# Altium PCB FPGA_board.PcbDoc (part 6 of 7)
Units mm, origin at the board's own origin, x right, y up, seen from the top; angles counter-clockwise.
Board outline 120 x 95 mm, 2 copper layers (Top Layer, Bottom Layer); 242 components, 219 nets, 1224 pads, 430 vias.
Unrouted connection lines stored in the file: 9.
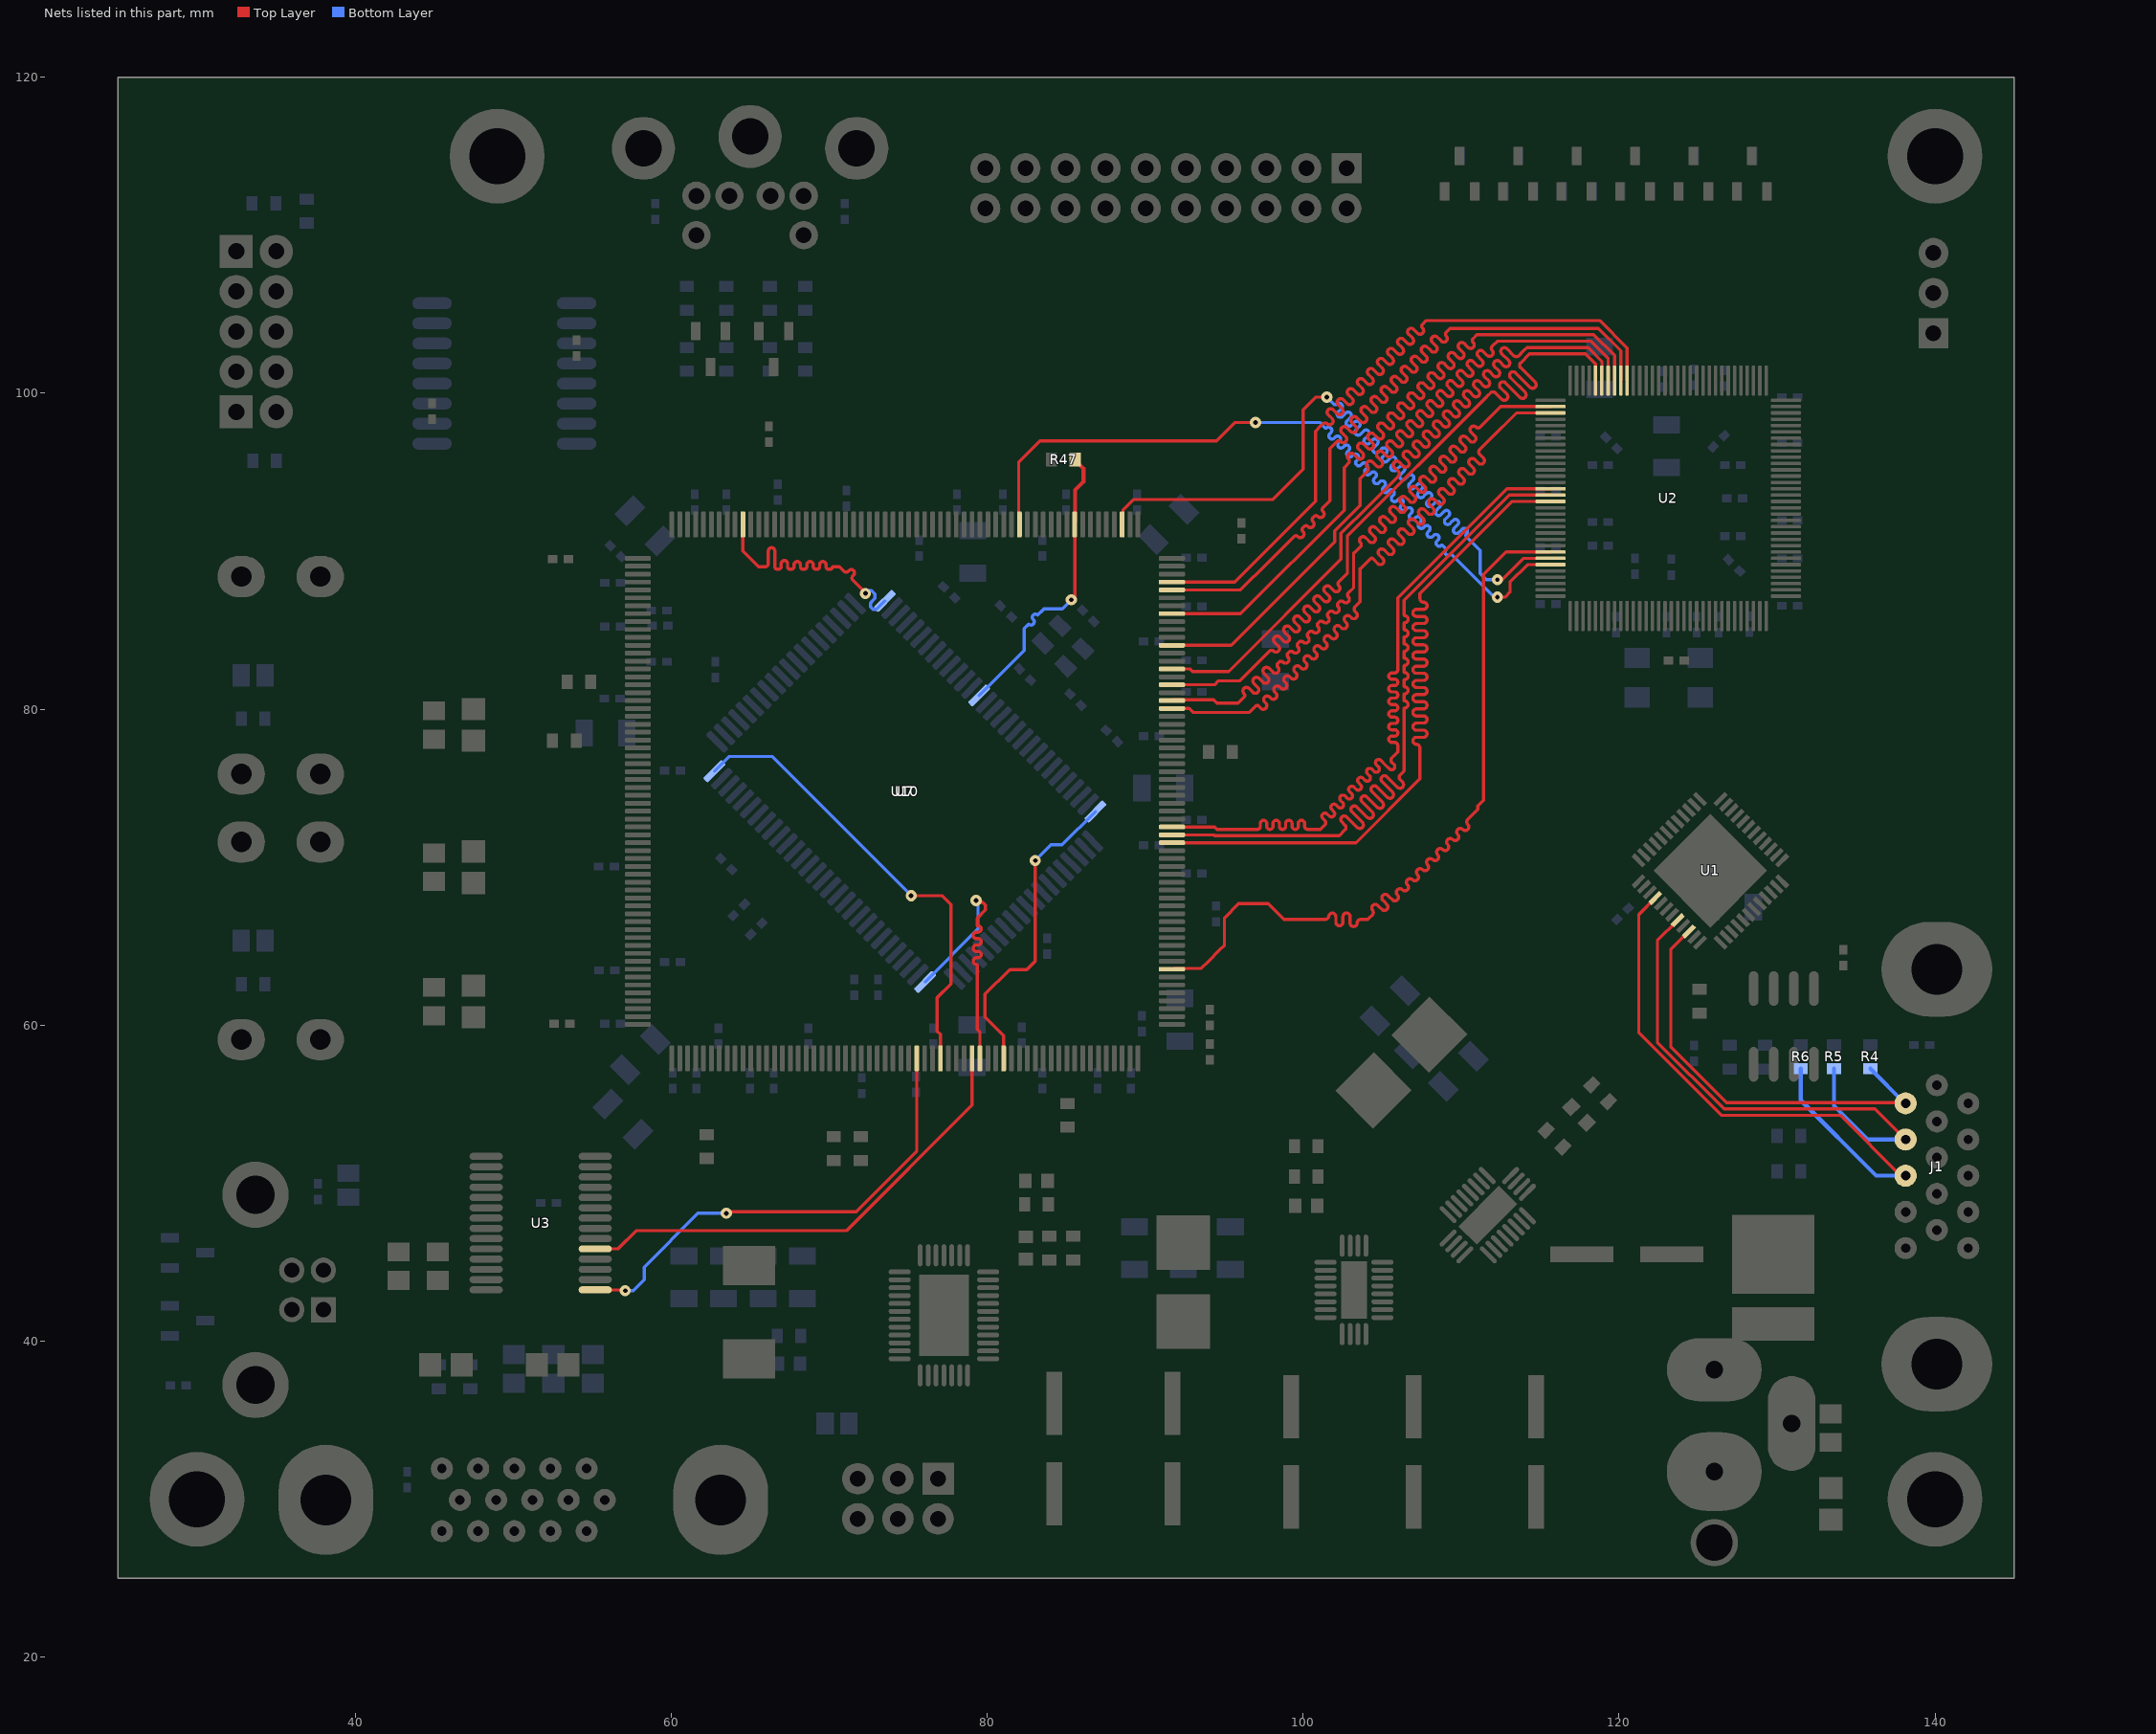
[diagram p6: the nets of this part, all layers, seen from the top]

## Via types
v1: diameter 0.71, hole 0.3, Top Layer to Bottom Layer, 393 vias
v2: diameter 1.4, hole 0.6, Top Layer to Bottom Layer, 32 vias
v3: diameter 2, hole 0.9, Top Layer to Bottom Layer, 4 vias
v4: diameter 1.2, hole 0.5, Top Layer to Bottom Layer, 1 vias

## Nets (pads, with @x,y where several pads share a name; then routed paths per layer and width w, separated by ;. In a path a pad name is that pad's centre, name@x,y a point inside that pad or via, vN(x,y) a via of type N, cw(c..) or ccw(c..) an arc to the next point about the centre after c; other vN are vias at no path point) (continued)
SRAM_PAR0: U7.231 U10.51 | length 19
  Top Layer w0.203: U7.231@64.55,91.7 64.55,90.025 65.55,89.025 65.956,89.025 ccw(c65.956,89.228) 66.159,89.228 66.159,90.022 cw(c66.362,90.022) 66.362,90.225 cw(c66.362,90.022) 66.565,90.022 66.565,89.025 ccw(c66.727,89.025) 66.727,88.863 66.809,88.863 ccw(c66.809,89.025) 66.971,89.025 66.971,89.211 cw(c67.174,89.211) 67.174,89.414 cw(c67.174,89.211) 67.377,89.211 67.377,89.025 ccw(c67.539,89.025) 67.539,88.863 67.621,88.863 ccw(c67.621,89.025) 67.783,89.025 67.783,89.144 cw(c67.986,89.144) 67.986,89.347 cw(c67.986,89.144) 68.189,89.144 68.189,89.025 ccw(c68.351,89.025) 68.351,88.863 68.433,88.863 ccw(c68.433,89.025) 68.595,89.025 68.595,89.144 cw(c68.798,89.144) 68.798,89.347 cw(c68.798,89.144) 69.001,89.144 69.001,89.025 ccw(c69.163,89.025) 69.163,88.863 69.245,88.863 ccw(c69.245,89.025) 69.407,89.025 69.407,89.144 cw(c69.61,89.144) 69.61,89.347 cw(c69.61,89.144) 69.813,89.144 69.813,89.025 ccw(c69.981,89.025) 69.981,88.857 70.051,88.857 ccw(c70.051,89.025) 70.219,89.025 70.65,89.025 70.937,88.738 ccw(c71.081,88.881) 71.224,88.738 71.265,88.778 cw(c71.408,88.635) 71.552,88.778 cw(c71.408,88.635) 71.552,88.491 71.511,88.451 ccw(c71.655,88.307) 71.511,88.164 72.3,87.375 v1(72.3,87.325)
  Bottom Layer w0.203: v1@72.3,87.512 72.688,87.512 72.9,87.3 72.9,87.006 72.625,86.731 72.625,86.475 72.775,86.325 72.996,86.325 U10.51@73.527,86.856
SRAM_PAR1: U7.103 U10.80 | length 20.1
  Top Layer w0.203: U7.103@81.05,57.9 81.05,59.35 79.875,60.525 79.875,61.975 81.4,63.5 81.444,63.5 81.46,63.517 82.516,63.517 83.05,64.05 v1(83.05,70.425)
  Bottom Layer w0.203: v1(83.05,70.425) 84.044,71.419 84.748,71.419 U10.80@86.856,73.527
SRAM_PAR2: U7.100 U10.1 | length 19.3
  Top Layer w0.203: v1(79.3,67.9) 79.352,67.847 79.352,67.802 79.35,67.8 79.7,67.8 79.9,67.6 79.9,67.3 79.375,66.775 79.375,66.5 79.375,66.344 ccw(c79.422,66.344) 79.422,66.297 cw(c79.422,66.094) 79.625,66.094 cw(c79.422,66.094) 79.422,65.891 79.375,65.891 79.328,65.891 ccw(c79.328,65.688) 79.125,65.688 ccw(c79.328,65.688) 79.328,65.485 79.375,65.485 79.422,65.485 cw(c79.422,65.282) 79.625,65.282 cw(c79.422,65.282) 79.422,65.079 79.375,65.079 79.328,65.079 ccw(c79.328,64.876) 79.125,64.876 ccw(c79.328,64.876) 79.328,64.673 79.375,64.673 79.422,64.673 cw(c79.422,64.47) 79.625,64.47 cw(c79.422,64.47) 79.422,64.267 79.375,64.267 79.328,64.267 ccw(c79.328,64.064) 79.125,64.064 ccw(c79.328,64.064) 79.328,63.861 cw(c79.328,63.814) 79.375,63.814 79.375,63.7 79.375,59.725 79.55,59.55 U7.100@79.55,57.9
  Bottom Layer w0.203: U10.1@76.073,62.744 79.425,66.096 79.425,67.725 79.35,67.8 79.352,67.802 79.352,67.847 v1(79.3,67.9)
SRAM_PAR3: U7.95 U10.30 | length 29.7
  Top Layer w0.203: v1@75.369,68.032 v1(75.2,68.2) 77.153,68.2 77.715,67.639 77.715,62.62 76.843,61.749 76.843,59.628 77.05,59.422 U7.95@77.05,57.9
  Bottom Layer w0.203: U10.30@62.744,76.073 63.684,77.013 66.387,77.013 v1(75.2,68.2)
SRAM_ZZ: R47.1 U7.189 U10.64 | length 19.5
  Top Layer w0.203: v1(85.337,86.929) 85.55,87.142 U7.189@85.55,91.7
  Top Layer w0.254: R47.1@85.55,95.8 86.1,95.25 86.1,94.4 85.573,93.873 U7.189@85.573,91.875
  Bottom Layer w0.203: U10.64@79.502,80.881 82.35,83.729 82.35,85.1 82.637,85.387 ccw(c82.781,85.531) 82.924,85.674 cw(c83.068,85.818) 83.211,85.961 ; 83.498,86.248 83.211,85.961 ; v1@85.337,86.712 v1(85.337,86.929) 84.758,86.35 83.6,86.35 83.525,86.275 83.211,85.961
UART_RXD: U3.1 U7.92 | length 30.4
  Top Layer w0.203: U3.1@55.2,43.25 v1@57.1,43.25 ; v1(63.5,48.1) 63.6,48.2 71.73,48.2 75.55,52.02 U7.92@75.55,57.9
  Bottom Layer w0.203: v1(57.1,43.2) 57.6,43.2 58.3,43.9 58.3,44.697 61.703,48.1 v1(63.5,48.1)
UART_TXD: U3.5 U7.99 | length 30.6
  Top Layer w0.203: U3.5@55.2,45.85 56.65,45.85 57.8,47 71.1,47 79.05,54.95 U7.99@79.05,57.9
VGA1_AB: J1.3 R6.1 U1.28 | length 39.9
  Top Layer w0.203: U1.28@122.293,68.06 121.25,67.018 121.25,59.525 126.475,54.3 134,54.3 J1.3@137.822,50.478
  Bottom Layer w0.254: R6.1@131.5,57.25 131.5,55.25 136.272,50.478 J1.3@138.135,50.478
VGA1_AG: J1.2 R5.1 U1.32 | length 34
  Top Layer w0.203: U1.32@123.707,66.646 122.425,65.364 122.425,58.92 126.642,54.703 136.2,54.703 J1.2@138.135,52.767
  Bottom Layer w0.254: R5.1@133.6,57.25 133.6,54.9 135.733,52.767 J1.2@137.809,52.767
VGA1_AR: J1.1 R4.2 U1.34 | length 27.2
  Top Layer w0.203: U1.34@124.414,65.939 123.275,64.8 123.275,58.64 126.809,55.106 J1.1@138.086,55.106
  Bottom Layer w0.254: R4.2@135.9,57.25 138.092,55.057 J1.1@138.135,55.057
VGA1_B0: U2.99 U7.161 | length 53.1
  Top Layer w0.2: U7.161@91.7,80.05 92.784,80.05 93.034,79.8 96.6,79.8 97,80.2 cw(c97.095,80.105) 97.19,80.2 97.325,80.065 ccw(c97.484,80.224) 97.643,80.065 ccw(c97.484,80.224) 97.643,80.384 97.572,80.454 cw(c97.732,80.613) 97.572,80.772 cw(c97.732,80.613) 97.891,80.772 97.961,80.702 ccw(c98.12,80.861) 98.28,80.702 ccw(c98.12,80.861) 98.28,81.02 98.209,81.091 cw(c98.368,81.25) 98.209,81.409 cw(c98.368,81.25) 98.527,81.409 98.598,81.338 ccw(c98.757,81.497) 98.916,81.338 ccw(c98.757,81.497) 98.916,81.656 98.845,81.727 cw(c99.004,81.886) 98.845,82.045 cw(c99.004,81.886) 99.163,82.045 99.234,81.975 ccw(c99.393,82.134) 99.552,81.975 ccw(c99.393,82.134) 99.552,82.293 99.482,82.363 cw(c99.641,82.523) 99.482,82.682 cw(c99.641,82.523) 99.8,82.682 99.871,82.611 ccw(c100.03,82.77) 100.189,82.611 ccw(c100.03,82.77) 100.189,82.929 100.118,83 cw(c100.277,83.159) 100.118,83.318 cw(c100.277,83.159) 100.436,83.318 100.507,83.247 ccw(c100.666,83.406) 100.825,83.247 ccw(c100.666,83.406) 100.825,83.566 100.754,83.636 cw(c100.914,83.795) 100.754,83.954 cw(c100.914,83.795) 101.073,83.954 101.143,83.884 ccw(c101.302,84.043) 101.462,83.884 ccw(c101.302,84.043) 101.462,84.202 101.391,84.273 cw(c101.55,84.432) 101.391,84.591 cw(c101.55,84.432) 101.709,84.591 101.78,84.52 ccw(c101.939,84.679) 102.098,84.52 ccw(c101.939,84.679) 102.098,84.838 102.027,84.909 cw(c102.186,85.068) 102.027,85.227 cw(c102.186,85.068) 102.345,85.227 102.416,85.156 ccw(c102.575,85.316) 102.734,85.156 ccw(c102.575,85.316) 102.734,85.475 102.664,85.545 cw(c102.823,85.705) 102.664,85.864 cw(c102.823,85.705) 102.982,85.864 103.053,85.793 ccw(c103.212,85.952) 103.371,85.793 ccw(c103.212,85.952) 103.371,86.111 103.3,86.182 cw(c103.459,86.341) 103.3,86.5 103.6,86.8 103.6,88.9 103.643,88.9 104.271,89.529 cw(c104.344,89.456) 104.416,89.529 104.73,89.214 ccw(c104.89,89.373) 105.049,89.214 ccw(c104.89,89.373) 105.049,89.532 104.821,89.76 cw(c104.98,89.919) 104.821,90.078 cw(c104.98,89.919) 105.139,90.078 105.367,89.851 ccw(c105.526,90.01) 105.685,89.851 ccw(c105.526,90.01) 105.685,90.169 105.457,90.396 cw(c105.617,90.556) 105.457,90.715 cw(c105.617,90.556) 105.776,90.715 106.003,90.487 ccw(c106.162,90.646) 106.321,90.487 ccw(c106.162,90.646) 106.321,90.805 106.094,91.033 cw(c106.253,91.192) 106.094,91.351 cw(c106.253,91.192) 106.412,91.351 106.64,91.123 ccw(c106.799,91.283) 106.958,91.123 ccw(c106.799,91.283) 106.958,91.442 106.73,91.669 cw(c106.889,91.828) 106.73,91.987 cw(c106.889,91.828) 107.048,91.987 107.276,91.76 ccw(c107.435,91.919) 107.594,91.76 ccw(c107.435,91.919) 107.594,92.078 107.367,92.306 cw(c107.526,92.465) 107.367,92.624 cw(c107.526,92.465) 107.685,92.624 107.912,92.396 ccw(c108.072,92.555) 108.231,92.396 ccw(c108.072,92.555) 108.231,92.714 108.003,92.942 cw(c108.162,93.101) 108.003,93.26 cw(c108.162,93.101) 108.321,93.26 108.549,93.033 ccw(c108.708,93.192) 108.867,93.033 ccw(c108.708,93.192) 108.867,93.351 108.639,93.578 cw(c108.798,93.738) 108.639,93.897 cw(c108.798,93.738) 108.958,93.897 109.185,93.669 ccw(c109.344,93.828) 109.503,93.669 ccw(c109.344,93.828) 109.503,93.987 109.276,94.215 cw(c109.435,94.374) 109.276,94.533 cw(c109.435,94.374) 109.594,94.533 109.822,94.305 ccw(c109.981,94.465) 110.14,94.305 ccw(c109.981,94.465) 110.14,94.624 109.912,94.851 cw(c110.071,95.01) 109.912,95.169 cw(c110.071,95.01) 110.23,95.169 110.458,94.942 ccw(c110.617,95.101) 110.776,94.942 ccw(c110.617,95.101) 110.776,95.26 110.549,95.488 cw(c110.708,95.647) 110.549,95.806 cw(c110.708,95.647) 110.867,95.806 111.094,95.578 ccw(c111.253,95.737) 111.413,95.578 ccw(c111.254,95.737) 111.413,95.896 111.185,96.124 cw(c111.344,96.283) 111.185,96.442 111.344,96.601 111.662,96.92 111.821,97.079 113.496,98.753 U2.99@115.66,98.753
VGA1_B1: U2.98 U7.162 | length 53.5
  Top Layer w0.2: U7.162@91.75,80.6 94.349,80.6 94.554,80.395 95.895,80.395 96.253,80.753 ccw(c96.129,80.877) 96.253,81.001 cw(c96.412,81.16) 96.253,81.319 cw(c96.412,81.16) 96.571,81.319 96.819,81.071 ccw(c96.978,81.231) 97.137,81.071 ccw(c96.978,81.231) 97.137,81.39 96.89,81.637 cw(c97.049,81.796) 96.89,81.955 cw(c97.049,81.796) 97.208,81.955 97.332,81.832 97.455,81.708 ccw(c97.614,81.867) 97.773,81.708 ccw(c97.614,81.867) 97.773,82.026 97.526,82.273 cw(c97.685,82.433) 97.526,82.592 cw(c97.685,82.433) 97.844,82.592 97.968,82.468 98.092,82.344 ccw(c98.251,82.503) 98.41,82.344 ccw(c98.251,82.503) 98.41,82.662 cw(c98.534,82.786) 98.41,82.91 98.481,82.981 cw(c98.604,82.857) 98.728,82.981 ccw(c98.887,83.14) 99.046,82.981 ccw(c98.887,83.14) 99.046,83.299 cw(c99.17,83.423) 99.046,83.546 99.117,83.617 cw(c99.241,83.493) 99.364,83.617 ccw(c99.524,83.776) 99.683,83.617 ccw(c99.524,83.776) 99.683,83.935 cw(c99.806,84.059) 99.683,84.183 99.753,84.253 cw(c99.877,84.13) 100.001,84.253 ccw(c100.16,84.412) 100.319,84.253 ccw(c100.16,84.412) 100.319,84.572 cw(c100.443,84.695) 100.319,84.819 100.39,84.89 cw(c100.514,84.766) 100.637,84.89 ccw(c100.796,85.049) 100.955,84.89 ccw(c100.796,85.049) 100.955,85.208 cw(c101.079,85.332) 100.955,85.455 101.026,85.526 cw(c101.15,85.402) 101.274,85.526 ccw(c101.433,85.685) 101.592,85.526 ccw(c101.433,85.685) 101.592,85.844 cw(c101.716,85.968) 101.592,86.092 101.663,86.163 cw(c101.786,86.039) 101.91,86.163 ccw(c102.069,86.322) 102.228,86.163 ccw(c102.069,86.322) 102.228,86.481 cw(c102.352,86.605) 102.228,86.728 102.299,86.799 cw(c102.423,86.675) 102.546,86.799 ccw(c102.706,86.958) 102.865,86.799 ccw(c102.706,86.958) 102.865,87.117 cw(c102.988,87.241) 102.865,87.365 103.2,87.7 103.2,89.9 103.247,89.9 103.6,90.253 103.635,90.289 ccw(c103.512,90.412) 103.635,90.536 cw(c103.794,90.695) 103.635,90.854 cw(c103.794,90.695) 103.954,90.854 104.077,90.731 104.201,90.607 ccw(c104.36,90.766) 104.519,90.607 ccw(c104.36,90.766) 104.519,90.925 104.395,91.049 104.272,91.173 cw(c104.431,91.332) 104.272,91.491 cw(c104.431,91.332) 104.59,91.491 104.714,91.367 104.837,91.243 ccw(c104.997,91.402) 105.156,91.243 ccw(c104.997,91.402) 105.156,91.562 105.032,91.685 104.908,91.809 cw(c105.067,91.968) 104.908,92.127 cw(c105.067,91.968) 105.226,92.127 105.35,92.003 105.474,91.88 ccw(c105.633,92.039) 105.792,91.88 ccw(c105.633,92.039) 105.792,92.198 105.668,92.322 105.545,92.445 cw(c105.704,92.605) 105.545,92.764 cw(c105.704,92.605) 105.863,92.764 105.986,92.64 106.11,92.516 ccw(c106.269,92.675) 106.428,92.516 ccw(c106.269,92.675) 106.428,92.834 106.305,92.958 106.181,93.082 cw(c106.34,93.241) 106.181,93.4 cw(c106.34,93.241) 106.499,93.4 106.623,93.276 106.747,93.153 ccw(c106.906,93.312) 107.065,93.153 ccw(c106.906,93.312) 107.065,93.471 106.941,93.594 106.817,93.718 cw(c106.976,93.877) 106.817,94.036 cw(c106.976,93.877) 107.136,94.036 107.259,93.913 107.383,93.789 ccw(c107.542,93.948) 107.701,93.789 ccw(c107.542,93.948) 107.701,94.107 107.577,94.231 107.454,94.355 cw(c107.613,94.514) 107.454,94.673 cw(c107.613,94.514) 107.772,94.673 107.896,94.549 108.019,94.425 ccw(c108.179,94.584) 108.338,94.425 ccw(c108.179,94.584) 108.338,94.744 108.214,94.867 108.09,94.991 cw(c108.249,95.15) 108.09,95.309 cw(c108.249,95.15) 108.408,95.309 108.532,95.185 108.656,95.062 ccw(c108.815,95.221) 108.974,95.062 ccw(c108.815,95.221) 108.974,95.38 108.85,95.504 108.727,95.627 cw(c108.886,95.786) 108.727,95.946 cw(c108.886,95.786) 109.045,95.946 109.168,95.822 109.292,95.698 ccw(c109.451,95.857) 109.61,95.698 ccw(c109.451,95.857) 109.61,96.016 109.487,96.14 109.363,96.264 cw(c109.522,96.423) 109.363,96.582 cw(c109.522,96.423) 109.681,96.582 109.805,96.458 109.929,96.334 ccw(c110.088,96.494) 110.247,96.335 ccw(c110.088,96.494) 110.247,96.653 110.123,96.776 109.999,96.9 cw(c110.158,97.059) 109.999,97.218 cw(c110.158,97.059) 110.318,97.218 110.441,97.095 110.565,96.971 ccw(c110.724,97.13) 110.883,96.971 ccw(c110.724,97.13) 110.883,97.289 110.759,97.413 110.636,97.537 cw(c110.795,97.696) 110.636,97.855 cw(c110.795,97.696) 110.954,97.855 ccw(c111.078,97.979) 111.201,97.855 112.173,98.827 112.5,99.153 U2.98@115.66,99.153
VGA1_B2: U2.88 U7.176 | length 53.6
  Top Layer w0.2: U7.176@91.7,87.55 96.05,87.55 97.8,89.3 99.426,90.926 cw(c99.55,90.802) 99.674,90.926 ccw(c99.833,91.085) 99.992,90.926 ccw(c99.833,91.085) 99.992,91.244 cw(c100.116,91.368) 99.992,91.492 100.063,91.563 cw(c100.186,91.439) 100.31,91.563 ccw(c100.469,91.722) 100.628,91.563 ccw(c100.469,91.722) 100.628,91.881 cw(c100.752,92.005) 100.628,92.128 100.699,92.199 cw(c100.823,92.075) 100.946,92.199 ccw(c101.106,92.358) 101.265,92.199 ccw(c101.106,92.358) 101.265,92.517 cw(c101.388,92.641) 101.265,92.765 101.3,92.8 101.7,93.2 101.7,96.5 102.15,96.95 cw(c102.259,96.841) 102.368,96.95 102.383,96.935 ccw(c102.542,97.094) 102.701,96.935 ccw(c102.542,97.094) 102.701,97.253 102.577,97.377 102.453,97.501 cw(c102.612,97.66) 102.453,97.819 cw(c102.612,97.66) 102.771,97.819 102.895,97.695 103.019,97.571 ccw(c103.178,97.731) 103.337,97.571 ccw(c103.178,97.731) 103.337,97.89 103.213,98.013 103.09,98.137 cw(c103.249,98.296) 103.09,98.455 cw(c103.249,98.296) 103.408,98.455 103.532,98.332 103.655,98.208 ccw(c103.814,98.367) 103.973,98.208 ccw(c103.814,98.367) 103.973,98.526 103.85,98.65 103.726,98.773 cw(c103.885,98.933) 103.726,99.092 cw(c103.885,98.933) 104.044,99.092 104.168,98.968 104.292,98.844 ccw(c104.451,99.003) 104.61,98.844 ccw(c104.451,99.003) 104.61,99.162 104.486,99.286 104.362,99.41 cw(c104.521,99.569) 104.362,99.728 cw(c104.521,99.569) 104.681,99.728 104.804,99.604 104.928,99.481 ccw(c105.087,99.64) 105.246,99.481 ccw(c105.087,99.64) 105.246,99.799 105.123,99.923 104.999,100.046 cw(c105.158,100.205) 104.999,100.364 cw(c105.158,100.205) 105.317,100.364 105.441,100.241 105.564,100.117 ccw(c105.724,100.276) 105.883,100.117 ccw(c105.724,100.276) 105.883,100.435 105.759,100.559 105.635,100.683 cw(c105.794,100.842) 105.635,101.001 cw(c105.794,100.842) 105.953,101.001 106.077,100.877 106.201,100.753 ccw(c106.36,100.912) 106.519,100.753 ccw(c106.36,100.912) 106.519,101.072 106.395,101.195 106.272,101.319 cw(c106.431,101.478) 106.272,101.637 cw(c106.431,101.478) 106.59,101.637 106.714,101.514 106.837,101.39 ccw(c106.996,101.549) 107.155,101.39 ccw(c106.996,101.549) 107.155,101.708 107.032,101.832 106.908,101.955 cw(c107.067,102.115) 106.908,102.274 cw(c107.067,102.115) 107.226,102.274 107.35,102.15 107.474,102.026 ccw(c107.633,102.185) 107.792,102.026 ccw(c107.633,102.185) 107.792,102.344 107.668,102.468 107.544,102.592 cw(c107.703,102.751) 107.544,102.91 cw(c107.703,102.751) 107.863,102.91 107.986,102.786 108.11,102.663 ccw(c108.269,102.822) 108.428,102.663 ccw(c108.269,102.822) 108.428,102.981 108.305,103.104 108.181,103.228 cw(c108.34,103.387) 108.181,103.546 cw(c108.34,103.387) 108.499,103.546 108.623,103.423 108.746,103.299 ccw(c108.906,103.458) 109.065,103.299 ccw(c108.906,103.458) 109.065,103.617 cw(c109.188,103.741) 109.065,103.865 109.1,103.9 109.3,104.1 118.7,104.1 120.11,102.69 U2.88@120.11,100.803
VGA1_B3: U2.87 U7.177 | length 52.6
  Top Layer w0.2: U7.177@91.7,88.05 95.684,88.05 100.8,93.166 100.8,97.6 ; 100.95,97.75 100.8,97.6 ; U2.87@120.51,100.803 120.51,102.524 120.51,102.856 118.766,104.6 107.8,104.6 107.6,104.4 107.565,104.365 ccw(c107.688,104.241) 107.565,104.117 cw(c107.406,103.958) 107.565,103.799 cw(c107.406,103.958) 107.246,103.799 107.123,103.923 106.999,104.046 ccw(c106.84,103.887) 106.681,104.046 ccw(c106.84,103.887) 106.681,103.728 106.805,103.605 106.928,103.481 cw(c106.769,103.322) 106.928,103.163 cw(c106.769,103.322) 106.61,103.163 106.486,103.286 106.363,103.41 ccw(c106.203,103.251) 106.044,103.41 ccw(c106.203,103.251) 106.044,103.092 106.168,102.968 106.292,102.844 cw(c106.133,102.685) 106.292,102.526 cw(c106.133,102.685) 105.974,102.526 105.85,102.65 105.726,102.774 ccw(c105.567,102.615) 105.408,102.774 ccw(c105.567,102.615) 105.408,102.455 105.532,102.332 105.655,102.208 cw(c105.496,102.049) 105.655,101.89 cw(c105.496,102.049) 105.337,101.89 105.214,102.014 105.09,102.137 ccw(c104.931,101.978) 104.772,102.137 ccw(c104.931,101.978) 104.772,101.819 104.895,101.695 105.019,101.572 cw(c104.86,101.412) 105.019,101.253 cw(c104.86,101.412) 104.701,101.253 104.577,101.377 104.453,101.501 ccw(c104.294,101.342) 104.135,101.501 ccw(c104.294,101.342) 104.135,101.183 104.259,101.059 104.383,100.935 cw(c104.224,100.776) 104.383,100.617 cw(c104.224,100.776) 104.064,100.617 103.941,100.741 103.817,100.864 ccw(c103.658,100.705) 103.499,100.864 ccw(c103.658,100.705) 103.499,100.546 103.623,100.423 103.746,100.299 cw(c103.587,100.14) 103.746,99.981 cw(c103.587,100.14) 103.428,99.981 103.304,100.104 103.181,100.228 ccw(c103.021,100.069) 102.862,100.228 ccw(c103.021,100.069) 102.862,99.91 102.986,99.786 103.11,99.662 cw(c102.951,99.503) 103.11,99.344 cw(c102.951,99.503) 102.792,99.344 102.668,99.468 102.544,99.592 ccw(c102.385,99.433) 102.226,99.592 ccw(c102.385,99.433) 102.226,99.273 102.35,99.15 102.474,99.026 cw(c102.314,98.867) 102.473,98.708 cw(c102.314,98.867) 102.155,98.708 102.032,98.832 101.908,98.955 ccw(c101.749,98.796) 101.59,98.955 ccw(c101.749,98.796) 101.59,98.637 101.713,98.513 101.837,98.39 cw(c101.678,98.231) 101.837,98.071 cw(c101.678,98.231) 101.519,98.071 ccw(c101.395,97.948) 101.271,98.071 101.077,97.877 100.8,97.6
VGA1_B4: U2.92 U7.164 | length 66.3
  Top Layer w0.2: U7.164@91.7,81.55 94.399,81.55 94.649,81.8 96,81.8 96.2,82 97.881,83.681 cw(c98.004,83.557) 98.128,83.681 ccw(c98.287,83.84) 98.446,83.681 ccw(c98.287,83.84) 98.446,83.999 98.323,84.123 98.199,84.246 cw(c98.358,84.405) 98.199,84.564 cw(c98.358,84.405) 98.517,84.564 98.641,84.441 98.764,84.317 ccw(c98.924,84.476) 99.083,84.317 ccw(c98.924,84.476) 99.083,84.635 98.959,84.759 98.835,84.883 cw(c98.994,85.042) 98.835,85.201 cw(c98.994,85.042) 99.153,85.201 99.277,85.077 99.401,84.953 ccw(c99.56,85.112) 99.719,84.953 ccw(c99.56,85.112) 99.719,85.272 99.595,85.395 99.472,85.519 cw(c99.631,85.678) 99.472,85.837 cw(c99.631,85.678) 99.79,85.837 99.914,85.714 100.037,85.59 ccw(c100.196,85.749) 100.355,85.59 ccw(c100.196,85.749) 100.355,85.908 100.232,86.032 100.108,86.155 cw(c100.267,86.315) 100.108,86.474 cw(c100.267,86.315) 100.426,86.474 100.55,86.35 100.674,86.226 ccw(c100.833,86.385) 100.992,86.226 ccw(c100.833,86.385) 100.992,86.544 100.868,86.668 100.744,86.792 cw(c100.903,86.951) 100.744,87.11 cw(c100.903,86.951) 101.063,87.11 101.186,86.986 101.31,86.863 ccw(c101.469,87.022) 101.628,86.863 ccw(c101.469,87.022) 101.628,87.181 101.504,87.305 101.381,87.428 cw(c101.54,87.587) 101.381,87.746 cw(c101.54,87.587) 101.699,87.746 101.823,87.623 101.946,87.499 ccw(c102.106,87.658) 102.265,87.499 ccw(c102.106,87.658) 102.265,87.817 cw(c102.388,87.941) 102.265,88.065 102.3,88.1 102.8,88.6 102.8,90.963 ; 111.619,99.781 102.8,90.963 ; U2.92@118.51,100.803 118.51,101.859 117.874,102.495 114.332,102.495 113.769,101.931 ccw(c113.928,101.772) 113.769,101.613 114.688,100.694 cw(c114.529,100.535) 114.688,100.376 cw(c114.529,100.535) 114.37,100.376 113.45,101.295 ccw(c113.291,101.136) 113.132,101.295 ccw(c113.291,101.136) 113.132,100.977 114.051,100.058 cw(c113.892,99.898) 114.051,99.739 cw(c113.892,99.898) 113.733,99.739 112.814,100.659 ccw(c112.655,100.499) 112.496,100.659 ccw(c112.655,100.499) 112.496,100.34 112.899,99.937 cw(c112.74,99.778) 112.899,99.619 cw(c112.74,99.778) 112.581,99.619 112.178,100.022 ccw(c112.019,99.863) 111.859,100.022 111.7,99.863 102.8,90.963
VGA1_B5: U2.91 U7.166 | length 53.8
  Top Layer w0.2: U7.166@91.7,82.55 92.85,82.55 93.005,82.395 95.295,82.395 102.4,89.5 102.4,91.128 104.172,92.9 106.017,94.745 ccw(c105.858,94.904) 106.017,95.063 105.763,95.317 cw(c105.922,95.476) 105.763,95.635 cw(c105.922,95.476) 106.081,95.635 106.335,95.381 ccw(c106.494,95.541) 106.653,95.381 ccw(c106.494,95.541) 106.653,95.7 106.399,95.954 cw(c106.558,96.113) 106.399,96.272 cw(c106.558,96.113) 106.717,96.272 106.971,96.018 ccw(c107.13,96.177) 107.289,96.018 ccw(c107.13,96.177) 107.289,96.336 107.036,96.59 cw(c107.195,96.749) 107.036,96.908 cw(c107.195,96.749) 107.354,96.908 107.608,96.654 ccw(c107.767,96.813) 107.926,96.654 ccw(c107.767,96.813) 107.926,96.972 107.672,97.226 cw(c107.831,97.385) 107.672,97.545 cw(c107.831,97.385) 107.99,97.545 108.244,97.291 ccw(c108.403,97.45) 108.562,97.291 ccw(c108.403,97.45) 108.562,97.609 108.308,97.863 cw(c108.467,98.022) 108.308,98.181 cw(c108.467,98.022) 108.627,98.181 108.88,97.927 ccw(c109.04,98.086) 109.199,97.927 ccw(c109.04,98.086) 109.199,98.245 108.945,98.499 cw(c109.104,98.658) 108.945,98.817 cw(c109.104,98.658) 109.263,98.817 109.517,98.563 ccw(c109.676,98.723) 109.835,98.563 ccw(c109.676,98.723) 109.835,98.882 109.581,99.136 cw(c109.74,99.295) 109.581,99.454 cw(c109.74,99.295) 109.899,99.454 110.153,99.2 ccw(c110.312,99.359) 110.471,99.2 ccw(c110.312,99.359) 110.471,99.518 110.218,99.772 cw(c110.377,99.931) 110.217,100.09 cw(c110.377,99.931) 110.536,100.09 110.79,99.836 ccw(c110.949,99.995) 111.108,99.836 ccw(c110.949,99.995) 111.108,100.154 110.854,100.408 cw(c111.013,100.567) 110.854,100.727 cw(c111.013,100.567) 111.172,100.727 111.426,100.473 ccw(c111.585,100.632) 111.744,100.473 ccw(c111.585,100.632) 111.744,100.791 111.49,101.045 cw(c111.649,101.204) 111.49,101.363 cw(c111.649,101.204) 111.808,101.363 112.062,101.109 ccw(c112.221,101.268) 112.381,101.109 ccw(c112.222,101.268) 112.381,101.427 112.127,101.681 cw(c112.286,101.84) 112.127,101.999 cw(c112.286,101.84) 112.445,101.999 112.699,101.745 ccw(c112.858,101.905) 113.017,101.745 ccw(c112.858,101.905) 113.017,102.064 112.58,102.501 cw(c112.739,102.66) 112.58,102.819 cw(c112.739,102.66) 112.898,102.819 113.335,102.382 ccw(c113.494,102.541) 113.653,102.382 ; 113.812,102.541 113.653,102.382 ; U2.91@118.91,100.803 118.91,102.024 118.039,102.895 114.166,102.895 113.972,102.7 113.653,102.382
VGA1_B6: U2.90 U7.169 | length 53.3
  Top Layer w0.2: U7.169@91.7,84.05 95.45,84.05 102,90.6 102,91.294 103.6,92.894 103.6,94.6 103.9,94.9 104.08,95.08 ccw(c103.957,95.204) 104.08,95.328 cw(c104.24,95.487) 104.08,95.646 cw(c104.24,95.487) 104.399,95.646 104.522,95.522 104.646,95.399 ccw(c104.805,95.558) 104.964,95.399 ccw(c104.805,95.558) 104.964,95.717 104.841,95.841 104.717,95.964 cw(c104.876,96.123) 104.717,96.282 cw(c104.876,96.123) 105.035,96.282 105.159,96.159 105.282,96.035 ccw(c105.442,96.194) 105.601,96.035 ccw(c105.442,96.194) 105.601,96.353 105.477,96.477 105.353,96.601 cw(c105.512,96.76) 105.353,96.919 cw(c105.512,96.76) 105.671,96.919 105.795,96.795 105.919,96.671 ccw(c106.078,96.831) 106.237,96.671 ccw(c106.078,96.831) 106.237,96.99 106.113,97.113 105.99,97.237 cw(c106.149,97.396) 105.99,97.555 cw(c106.149,97.396) 106.308,97.555 106.432,97.432 106.555,97.308 ccw(c106.714,97.467) 106.873,97.308 ccw(c106.714,97.467) 106.873,97.626 106.75,97.75 106.626,97.873 cw(c106.785,98.033) 106.626,98.192 cw(c106.785,98.033) 106.944,98.192 107.068,98.068 107.192,97.944 ccw(c107.351,98.103) 107.51,97.944 ccw(c107.351,98.103) 107.51,98.262 107.386,98.386 107.262,98.51 cw(c107.421,98.669) 107.262,98.828 cw(c107.421,98.669) 107.581,98.828 107.704,98.704 107.828,98.581 ccw(c107.987,98.74) 108.146,98.581 ccw(c107.987,98.74) 108.146,98.899 108.023,99.023 107.899,99.146 cw(c108.058,99.305) 107.899,99.464 cw(c108.058,99.305) 108.217,99.464 108.341,99.341 108.464,99.217 ccw(c108.624,99.376) 108.783,99.217 ccw(c108.624,99.376) 108.783,99.535 108.659,99.659 108.535,99.783 cw(c108.694,99.942) 108.535,100.101 cw(c108.694,99.942) 108.853,100.101 108.977,99.977 109.101,99.853 ccw(c109.26,100.012) 109.419,99.853 ccw(c109.26,100.012) 109.419,100.172 109.295,100.295 109.172,100.419 cw(c109.331,100.578) 109.172,100.737 cw(c109.331,100.578) 109.49,100.737 109.613,100.614 109.737,100.49 ccw(c109.896,100.649) 110.055,100.49 ccw(c109.896,100.649) 110.055,100.808 109.932,100.932 109.808,101.055 cw(c109.967,101.215) 109.808,101.374 cw(c109.967,101.215) 110.126,101.374 110.25,101.25 110.374,101.126 ccw(c110.533,101.285) 110.692,101.126 ccw(c110.533,101.285) 110.692,101.444 110.568,101.568 110.444,101.692 cw(c110.603,101.851) 110.444,102.01 cw(c110.603,101.851) 110.763,102.01 110.886,101.886 111.01,101.763 ccw(c111.169,101.922) 111.328,101.763 ccw(c111.169,101.922) 111.328,102.081 111.205,102.205 111.081,102.328 cw(c111.24,102.487) 111.081,102.646 cw(c111.24,102.487) 111.399,102.646 111.523,102.523 111.646,102.399 ccw(c111.806,102.558) 111.965,102.399 ccw(c111.806,102.558) 111.965,102.717 cw(c112.088,102.841) 111.965,102.965 112,103 112.295,103.295 114.595,103.295 114.6,103.3 118.2,103.3 119.31,102.19 U2.90@119.31,100.803
VGA1_B7: U2.89 U7.173 | length 53.4
  Top Layer w0.2: U7.173@91.7,86.05 96.05,86.05 102.6,92.6 102.6,94.8 102.6,95.075 102.6,95.3 102.686,95.386 102.88,95.58 ccw(c102.757,95.704) 102.88,95.828 cw(c103.04,95.987) 102.88,96.146 cw(c103.04,95.987) 103.199,96.146 103.322,96.022 103.446,95.899 ccw(c103.605,96.058) 103.764,95.899 ccw(c103.605,96.058) 103.764,96.217 103.641,96.341 103.517,96.464 cw(c103.676,96.623) 103.517,96.782 cw(c103.676,96.623) 103.835,96.782 103.959,96.659 104.082,96.535 ccw(c104.242,96.694) 104.401,96.535 ccw(c104.242,96.694) 104.401,96.853 104.277,96.977 104.153,97.101 cw(c104.312,97.26) 104.153,97.419 cw(c104.312,97.26) 104.471,97.419 104.595,97.295 104.719,97.171 ccw(c104.878,97.331) 105.037,97.171 ccw(c104.878,97.331) 105.037,97.49 104.913,97.613 104.79,97.737 ; 104.79,97.737 cw(c104.949,97.896) 104.79,98.055 ; 104.79,98.055 cw(c104.949,97.896) 105.108,98.055 105.232,97.932 105.355,97.808 ccw(c105.514,97.967) 105.673,97.808 ccw(c105.514,97.967) 105.673,98.126 105.55,98.25 105.426,98.373 cw(c105.585,98.533) 105.426,98.692 cw(c105.585,98.533) 105.744,98.692 105.868,98.568 105.992,98.444 ccw(c106.151,98.603) 106.31,98.444 ccw(c106.151,98.603) 106.31,98.762 106.186,98.886 106.062,99.01 cw(c106.221,99.169) 106.062,99.328 cw(c106.221,99.169) 106.381,99.328 106.504,99.204 106.628,99.081 ccw(c106.787,99.24) 106.946,99.081 ccw(c106.787,99.24) 106.946,99.399 106.823,99.523 106.699,99.646 cw(c106.858,99.805) 106.699,99.964 cw(c106.858,99.805) 107.017,99.964 107.141,99.841 107.264,99.717 ccw(c107.424,99.876) 107.583,99.717 ccw(c107.424,99.876) 107.583,100.035 107.459,100.159 107.335,100.283 cw(c107.494,100.442) 107.335,100.601 cw(c107.494,100.442) 107.653,100.601 107.777,100.477 107.901,100.353 ccw(c108.06,100.512) 108.219,100.353 ccw(c108.06,100.512) 108.219,100.672 108.095,100.795 107.972,100.919 cw(c108.131,101.078) 107.972,101.237 cw(c108.131,101.078) 108.29,101.237 108.413,101.114 108.537,100.99 ccw(c108.696,101.149) 108.855,100.99 ccw(c108.696,101.149) 108.855,101.308 108.732,101.432 108.608,101.555 cw(c108.767,101.715) 108.608,101.874 cw(c108.767,101.715) 108.926,101.874 109.05,101.75 109.174,101.626 ccw(c109.333,101.785) 109.492,101.626 ccw(c109.333,101.785) 109.492,101.944 109.368,102.068 109.244,102.192 cw(c109.403,102.351) 109.244,102.51 cw(c109.403,102.351) 109.563,102.51 109.686,102.386 109.81,102.263 ccw(c109.969,102.422) 110.128,102.263 ccw(c109.969,102.422) 110.128,102.581 110.005,102.704 109.881,102.828 cw(c110.04,102.987) 109.881,103.146 cw(c110.04,102.987) 110.199,103.146 110.323,103.023 110.446,102.899 ccw(c110.606,103.058) 110.765,102.899 ccw(c110.606,103.058) 110.765,103.217 cw(c110.888,103.341) 110.765,103.465 110.8,103.5 111,103.7 118.4,103.7 119.71,102.39 U2.89@119.71,100.803
VGA1_CS_N: U2.123 U7.196 | length 53.3
  Top Layer w0.2: U7.196@82,91.75 82,95.625 83.35,96.975 94.525,96.975 95.7,98.15 v1(96.988,98.15) ; v1@112.1,87.1 112.8,87.1 113.1,87.4 113.1,88.053 114.2,89.153 U2.123@115.66,89.153
  Bottom Layer w0.2: v1@96.875,98.15 96.9,98.175 v1@96.988,98.175 ; v1(96.988,98.15) 101.05,98.15 101.406,97.794 ccw(c101.441,97.829) 101.477,97.794 cw(c101.618,97.653) 101.76,97.794 cw(c101.618,97.653) 101.76,97.511 101.724,97.476 101.689,97.44 ccw(c101.83,97.299) 101.689,97.158 ccw(c101.83,97.299) 101.972,97.158 102.042,97.228 cw(c102.184,97.087) 102.325,97.228 cw(c102.184,97.087) 102.325,96.945 102.29,96.91 102.255,96.875 ccw(c102.396,96.733) 102.255,96.592 ccw(c102.396,96.733) 102.537,96.592 102.573,96.627 102.608,96.663 cw(c102.75,96.521) 102.891,96.663 cw(c102.75,96.521) 102.891,96.38 102.856,96.344 102.82,96.309 ccw(c102.962,96.168) 102.82,96.026 ccw(c102.962,96.168) 103.103,96.026 103.138,96.062 103.174,96.097 cw(c103.315,95.955) 103.457,96.097 cw(c103.315,95.955) 103.457,95.814 103.421,95.779 103.386,95.743 ccw(c103.527,95.602) 103.386,95.46 ccw(c103.527,95.602) 103.669,95.46 103.739,95.531 cw(c103.881,95.39) 104.022,95.531 cw(c103.881,95.39) 104.022,95.248 103.987,95.213 103.952,95.178 ccw(c104.093,95.036) 103.952,94.895 ccw(c104.093,95.036) 104.234,94.895 104.27,94.93 104.305,94.966 cw(c104.447,94.824) 104.588,94.966 cw(c104.447,94.824) 104.588,94.683 104.553,94.647 104.517,94.612 ccw(c104.659,94.471) 104.517,94.329 ccw(c104.659,94.471) 104.8,94.329 104.836,94.364 104.871,94.4 cw(c105.012,94.258) 105.154,94.4 cw(c105.012,94.258) 105.154,94.117 105.118,94.082 105.083,94.046 ccw(c105.224,93.905) 105.083,93.763 ccw(c105.224,93.905) 105.366,93.763 105.437,93.834 cw(c105.578,93.693) 105.719,93.834 cw(c105.578,93.693) 105.719,93.551 105.684,93.516 105.649,93.481 ccw(c105.79,93.339) 105.649,93.198 ccw(c105.79,93.339) 105.932,93.198 105.967,93.233 106.002,93.268 cw(c106.144,93.127) 106.285,93.268 cw(c106.144,93.127) 106.285,92.986 106.25,92.95 106.214,92.915 ccw(c106.356,92.773) 106.214,92.632 ccw(c106.356,92.773) 106.497,92.632 106.533,92.667 106.568,92.703 cw(c106.709,92.561) 106.851,92.703 cw(c106.709,92.561) 106.851,92.42 106.78,92.349 ccw(c106.921,92.208) 106.78,92.066 ccw(c106.921,92.208) 107.063,92.066 107.098,92.102 107.134,92.137 cw(c107.275,91.996) 107.416,92.137 cw(c107.275,91.996) 107.416,91.854 107.381,91.819 107.346,91.784 ccw(c107.487,91.642) 107.346,91.501 ccw(c107.487,91.642) 107.629,91.501 107.664,91.536 107.699,91.571 cw(c107.841,91.43) 107.982,91.571 cw(c107.841,91.43) 107.982,91.289 107.947,91.253 107.911,91.218 ccw(c108.053,91.076) 107.911,90.935 ccw(c108.053,91.076) 108.194,90.935 108.23,90.97 108.265,91.006 cw(c108.406,90.864) 108.548,91.006 cw(c108.406,90.864) 108.548,90.723 108.477,90.652 ccw(c108.619,90.511) 108.477,90.369 ccw(c108.619,90.511) 108.76,90.369 cw(c108.795,90.334) 108.831,90.369 109.043,90.157 cw(c109.007,90.122) 109.043,90.086 ccw(c109.184,89.945) 109.043,89.804 ccw(c109.184,89.945) 109.326,89.804 cw(c109.361,89.768) 109.396,89.804 v1@112.1,87.1
  other v1: 112.3,87.1
VGA1_DC_N: U2.122 U7.183 | length 53.9
  Top Layer w0.2: U7.183@88.6,92.3 88.6,92.605 89.266,93.271 98.071,93.271 100,95.2 100,98.95 100.8,99.75 v1(101.5,99.75) ; v1@112.1,88.2 112.6,88.2 113.953,89.553 U2.122@115.66,89.553
  Bottom Layer w0.2: v1(101.5,99.75) 101.9,99.35 101.935,99.314 ccw(c102.041,99.42) 102.147,99.314 cw(c102.289,99.173) 102.43,99.314 cw(c102.289,99.173) 102.43,99.031 102.324,98.925 102.218,98.819 ccw(c102.36,98.678) 102.218,98.536 ccw(c102.36,98.678) 102.501,98.536 102.607,98.642 102.713,98.749 cw(c102.855,98.607) 102.996,98.749 cw(c102.855,98.607) 102.996,98.466 102.89,98.36 102.784,98.254 ccw(c102.925,98.112) 102.784,97.971 ccw(c102.925,98.112) 103.067,97.971 103.173,98.077 103.279,98.183 cw(c103.42,98.041) 103.562,98.183 cw(c103.42,98.041) 103.562,97.9 103.456,97.794 103.35,97.688 ccw(c103.491,97.546) 103.35,97.405 ccw(c103.491,97.546) 103.632,97.405 103.738,97.511 103.845,97.617 cw(c103.986,97.476) 104.127,97.617 cw(c103.986,97.476) 104.127,97.334 104.021,97.228 103.915,97.122 ccw(c104.057,96.981) 103.915,96.839 ccw(c104.057,96.981) 104.198,96.839 104.304,96.945 104.41,97.052 cw(c104.552,96.91) 104.693,97.052 cw(c104.552,96.91) 104.693,96.769 104.587,96.663 104.481,96.557 ccw(c104.622,96.415) 104.481,96.274 ccw(c104.622,96.415) 104.764,96.274 104.87,96.38 104.976,96.486 cw(c105.117,96.344) 105.259,96.486 cw(c105.117,96.344) 105.259,96.203 105.153,96.097 105.047,95.991 ccw(c105.188,95.849) 105.047,95.708 ccw(c105.188,95.849) 105.329,95.708 105.436,95.814 105.542,95.92 cw(c105.683,95.779) 105.824,95.92 cw(c105.683,95.779) 105.824,95.637 105.718,95.531 105.612,95.425 ccw(c105.754,95.284) 105.612,95.142 ccw(c105.754,95.284) 105.895,95.142 106.001,95.248 106.107,95.354 cw(c106.249,95.213) 106.39,95.354 cw(c106.249,95.213) 106.39,95.072 106.284,94.966 106.178,94.86 ccw(c106.319,94.718) 106.178,94.577 ccw(c106.319,94.718) 106.461,94.577 106.567,94.683 106.673,94.789 cw(c106.814,94.647) 106.956,94.789 cw(c106.814,94.647) 106.956,94.506 106.85,94.4 106.744,94.294 ccw(c106.885,94.152) 106.744,94.011 ccw(c106.885,94.152) 107.027,94.011 107.133,94.117 107.239,94.223 cw(c107.38,94.082) 107.521,94.223 cw(c107.38,94.082) 107.521,93.94 107.415,93.834 107.309,93.728 ccw(c107.451,93.587) 107.309,93.445 ccw(c107.451,93.587) 107.592,93.445 107.698,93.551 107.804,93.657 cw(c107.946,93.516) 108.087,93.657 cw(c107.946,93.516) 108.087,93.375 107.981,93.268 107.875,93.162 ccw(c108.016,93.021) 107.875,92.88 ccw(c108.016,93.021) 108.158,92.88 108.264,92.986 108.37,93.092 cw(c108.511,92.95) 108.653,93.092 cw(c108.511,92.95) 108.653,92.809 108.547,92.703 108.441,92.597 ccw(c108.582,92.455) 108.441,92.314 ccw(c108.582,92.455) 108.724,92.314 108.83,92.42 108.936,92.526 cw(c109.077,92.385) 109.219,92.526 cw(c109.077,92.385) 109.219,92.243 109.112,92.137 109.006,92.031 ccw(c109.148,91.89) 109.006,91.748 ccw(c109.148,91.89) 109.289,91.748 109.395,91.854 109.501,91.96 cw(c109.643,91.819) 109.784,91.96 cw(c109.643,91.819) 109.784,91.678 109.678,91.571 109.572,91.465 ccw(c109.714,91.324) 109.572,91.183 ccw(c109.714,91.324) 109.855,91.183 109.961,91.289 110.067,91.395 cw(c110.208,91.253) 110.35,91.395 cw(c110.208,91.253) 110.35,91.112 ccw(c110.456,91.006) 110.35,90.9 110.85,90.4 111.2,90.05 111.2,88.6 111.6,88.2 v1@112.1,88.2
  other v1: 112.3,88.2
VGA1_E_N: U2.121 U7.128 | length 53.6
  Top Layer w0.2: U7.128@91.7,63.55 U7.128@91.75,63.55 ; U7.128@91.8,63.6 93.561,63.6 94,64.038 94,64.049 94.705,64.755 94.716,64.755 95.025,65.064 95.025,66.8 95.925,67.7 97.8,67.7 98.8,66.7 99.8,66.7 101.4,66.7 ccw(c101.4,66.925) 101.625,66.925 ; 101.625,66.882 cw(c101.85,66.882) 101.85,67.107 cw(c101.85,66.882) 102.075,66.882 102.075,66.7 102.075,66.518 ccw(c102.3,66.518) 102.3,66.293 ccw(c102.3,66.518) 102.525,66.518 102.525,66.7 102.525,66.882 cw(c102.75,66.882) 102.75,67.107 cw(c102.75,66.882) 102.975,66.882 102.975,66.7 102.975,66.475 ccw(c103.2,66.475) 103.2,66.25 ccw(c103.2,66.475) 103.425,66.475 cw(c103.65,66.475) 103.65,66.7 103.875,66.7 104.1,66.7 104.222,66.822 104.381,66.981 ccw(c104.222,67.14) 104.381,67.299 ; 104.412,67.269 cw(c104.571,67.428) 104.412,67.587 cw(c104.571,67.428) 104.73,67.587 104.858,67.458 104.987,67.33 ccw(c105.146,67.489) 105.305,67.33 ccw(c105.146,67.489) 105.305,67.648 105.177,67.777 105.048,67.905 cw(c105.207,68.064) 105.048,68.223 cw(c105.207,68.064) 105.366,68.223 105.495,68.095 105.654,67.936 ccw(c105.813,68.095) 105.972,67.936 ccw(c105.813,68.095) 105.972,68.254 cw(c106.131,68.413) 105.972,68.572 cw(c106.131,68.413) 106.29,68.572 ccw(c106.449,68.731) 106.608,68.572 ccw(c106.449,68.731) 106.608,68.89 cw(c106.768,69.049) 106.608,69.208 cw(c106.768,69.049) 106.927,69.208 ccw(c107.086,69.368) 107.245,69.208 ccw(c107.086,69.368) 107.245,69.527 cw(c107.404,69.686) 107.245,69.845 cw(c107.404,69.686) 107.563,69.845 ccw(c107.722,70.004) 107.881,69.845 ccw(c107.722,70.004) 107.881,70.163 cw(c108.04,70.322) 107.881,70.481 cw(c108.04,70.322) 108.199,70.481 ccw(c108.359,70.64) 108.518,70.481 ccw(c108.359,70.64) 108.518,70.799 cw(c108.677,70.959) 108.518,71.118 cw(c108.677,70.959) 108.836,71.118 ccw(c108.995,71.277) 109.154,71.118 ccw(c108.995,71.277) 109.154,71.436 cw(c109.313,71.595) 109.154,71.754 cw(c109.313,71.595) 109.472,71.754 ccw(c109.631,71.913) 109.79,71.754 ccw(c109.631,71.913) 109.79,72.072 cw(c109.95,72.231) 109.79,72.39 cw(c109.95,72.231) 110.109,72.39 ccw(c110.268,72.55) 110.427,72.39 ccw(c110.268,72.55) 110.427,72.709 cw(c110.586,72.868) 110.427,73.027 110.586,73.186 110.904,73.504 111.063,73.663 111.063,73.879 111.42,74.236 111.42,88.52 112.853,89.953 U2.121@115.66,89.953
VGA1_G0: U2.113 U7.144 | length 53.6
  Top Layer w0.2: U7.144@91.7,71.55 103.35,71.55 107.4,75.6 107.4,76.5 107.4,77.55 ccw(c107.175,77.55) 107.175,77.775 107.178,77.775 cw(c107.178,78) 106.953,78 cw(c107.178,78) 107.178,78.225 107.4,78.225 107.622,78.225 ccw(c107.622,78.45) 107.847,78.45 ccw(c107.622,78.45) 107.622,78.675 107.4,78.675 107.178,78.675 cw(c107.178,78.9) 106.953,78.9 cw(c107.178,78.9) 107.178,79.125 107.4,79.125 107.622,79.125 ccw(c107.622,79.35) 107.847,79.35 ccw(c107.622,79.35) 107.622,79.575 107.4,79.575 107.178,79.575 cw(c107.178,79.8) 106.953,79.8 cw(c107.178,79.8) 107.178,80.025 107.4,80.025 107.622,80.025 ccw(c107.622,80.25) 107.847,80.25 ccw(c107.622,80.25) 107.622,80.475 107.4,80.475 107.178,80.475 cw(c107.178,80.7) 106.953,80.7 cw(c107.178,80.7) 107.178,80.925 107.4,80.925 107.622,80.925 ccw(c107.622,81.15) 107.847,81.15 ccw(c107.622,81.15) 107.622,81.375 107.4,81.375 107.178,81.375 cw(c107.178,81.6) 106.953,81.6 cw(c107.178,81.6) 107.178,81.825 107.4,81.825 107.622,81.825 ccw(c107.622,82.05) 107.847,82.05 ccw(c107.622,82.05) 107.622,82.275 107.4,82.275 107.178,82.275 cw(c107.178,82.5) 106.953,82.5 cw(c107.178,82.5) 107.178,82.725 107.4,82.725 107.622,82.725 ccw(c107.622,82.95) 107.847,82.95 ccw(c107.622,82.95) 107.622,83.175 107.4,83.175 107.178,83.175 cw(c107.178,83.4) 106.953,83.4 cw(c107.178,83.4) 107.178,83.625 107.4,83.625 107.622,83.625 ccw(c107.622,83.85) 107.847,83.85 ccw(c107.622,83.85) 107.622,84.075 107.4,84.075 107.178,84.075 cw(c107.178,84.3) 106.953,84.3 cw(c107.178,84.3) 107.178,84.525 107.4,84.525 107.622,84.525 ccw(c107.622,84.75) 107.847,84.75 ccw(c107.622,84.75) 107.622,84.975 107.4,84.975 107.178,84.975 cw(c107.178,85.2) 106.953,85.2 cw(c107.178,85.2) 107.178,85.425 107.4,85.425 107.622,85.425 ccw(c107.622,85.65) 107.847,85.65 ccw(c107.622,85.65) 107.622,85.875 107.4,85.875 107.178,85.875 cw(c107.178,86.1) 106.953,86.1 cw(c107.178,86.1) 107.178,86.325 107.4,86.325 107.625,86.325 ccw(c107.625,86.55) 107.85,86.55 ccw(c107.625,86.55) 107.625,86.775 cw(c107.625,87) 107.4,87 107.4,87.328 113.225,93.153 113.795,93.153 U2.113@115.66,93.153
VGA1_G1: U2.112 U7.145 | length 53
  Top Layer w0.2: U7.145@91.7,72.05 94.333,72.05 94.388,71.995 102.295,71.995 102.65,72.35 ccw(c102.491,72.509) 102.65,72.668 102.451,72.867 cw(c102.61,73.026) 102.451,73.185 cw(c102.61,73.026) 102.769,73.185 103.127,72.827 103.435,72.519 ccw(c103.594,72.678) 103.753,72.519 ccw(c103.594,72.678) 103.753,72.837 103.445,73.145 103.087,73.503 cw(c103.246,73.662) 103.087,73.822 cw(c103.246,73.663) 103.405,73.822 103.764,73.464 104.072,73.155 ccw(c104.231,73.315) 104.39,73.155 ccw(c104.231,73.315) 104.39,73.474 104.082,73.782 103.724,74.14 cw(c103.883,74.299) 103.724,74.458 cw(c103.883,74.299) 104.042,74.458 104.4,74.1 104.708,73.792 ccw(c104.867,73.951) 105.026,73.792 ccw(c104.867,73.951) 105.026,74.11 104.718,74.418 104.36,74.776 cw(c104.519,74.935) 104.36,75.094 cw(c104.519,74.935) 104.678,75.094 105.036,74.736 105.344,74.428 ccw(c105.503,74.587) 105.663,74.428 ccw(c105.503,74.587) 105.663,74.746 105.355,75.055 104.996,75.413 cw(c105.156,75.572) 104.996,75.731 cw(c105.156,75.572) 105.315,75.731 105.673,75.373 105.981,75.065 ccw(c106.14,75.224) 106.299,75.065 ccw(c106.14,75.224) 106.299,75.383 106.15,75.532 cw(c106.309,75.691) 106.15,75.85 106.4,76.1 106.4,79.4 106.4,79.625 106.4,80.05 cw(c106.425,80.05) 106.425,80.075 ccw(c106.425,80.3) 106.65,80.3 ccw(c106.425,80.3) 106.425,80.525 cw(c106.425,80.55) 106.4,80.55 106.4,80.95 cw(c106.425,80.95) 106.425,80.975 ccw(c106.425,81.2) 106.65,81.2 ccw(c106.425,81.2) 106.425,81.425 cw(c106.425,81.45) 106.4,81.45 106.4,81.85 cw(c106.425,81.85) 106.425,81.875 ccw(c106.425,82.1) 106.65,82.1 ccw(c106.425,82.1) 106.425,82.325 cw(c106.425,82.35) 106.4,82.35 106.4,82.75 cw(c106.425,82.75) 106.425,82.775 ccw(c106.425,83) 106.65,83 ccw(c106.425,83) 106.425,83.225 cw(c106.425,83.25) 106.4,83.25 106.4,83.65 cw(c106.425,83.65) 106.425,83.675 ccw(c106.425,83.9) 106.65,83.9 ccw(c106.425,83.9) 106.425,84.125 cw(c106.425,84.15) 106.4,84.15 106.4,84.55 cw(c106.425,84.55) 106.425,84.575 ccw(c106.425,84.8) 106.65,84.8 ccw(c106.425,84.8) 106.425,85.025 cw(c106.425,85.05) 106.4,85.05 106.4,85.45 cw(c106.425,85.45) 106.425,85.475 ccw(c106.425,85.7) 106.65,85.7 ccw(c106.425,85.7) 106.425,85.925 cw(c106.425,85.95) 106.4,85.95 106.4,86.375 106.4,86.8 106.4,86.894 113.059,93.553 113.63,93.553 U2.112@115.66,93.553
VGA1_G2: U2.111 U7.146 | length 53.8
  Top Layer w0.2: U7.146@91.7,72.55 94.399,72.55 94.554,72.395 97.1,72.395 ccw(c97.1,72.595) 97.3,72.595 97.3,72.777 cw(c97.5,72.777) 97.5,72.977 cw(c97.5,72.777) 97.7,72.777 97.7,72.595 ccw(c97.9,72.595) 97.9,72.395 ccw(c97.9,72.595) 98.1,72.595 98.1,72.777 cw(c98.3,72.777) 98.3,72.977 cw(c98.3,72.777) 98.5,72.777 98.5,72.595 ccw(c98.7,72.595) 98.7,72.395 ccw(c98.7,72.595) 98.9,72.595 98.9,72.777 cw(c99.1,72.777) 99.1,72.977 cw(c99.1,72.777) 99.3,72.777 99.3,72.595 ccw(c99.5,72.595) 99.5,72.395 ccw(c99.5,72.595) 99.7,72.595 99.7,72.777 cw(c99.9,72.777) 99.9,72.977 cw(c99.9,72.777) 100.1,72.777 100.1,72.595 ccw(c100.3,72.595) 100.3,72.395 ; 100.5,72.395 100.3,72.395 ; U2.111@115.66,93.953 113.795,93.953 113.464,93.953 112.894,93.953 106,87.06 106,82.8 106,82.5 cw(c105.8,82.5) 105.8,82.3 105.618,82.3 ccw(c105.618,82.1) 105.418,82.1 ccw(c105.618,82.1) 105.618,81.9 105.8,81.9 cw(c105.8,81.7) 106,81.7 cw(c105.8,81.7) 105.8,81.5 105.618,81.5 ccw(c105.618,81.3) 105.418,81.3 ccw(c105.618,81.3) 105.618,81.1 105.8,81.1 cw(c105.8,80.9) 106,80.9 cw(c105.8,80.9) 105.8,80.7 105.618,80.7 ccw(c105.618,80.5) 105.418,80.5 ccw(c105.618,80.5) 105.618,80.3 105.8,80.3 cw(c105.8,80.1) 106,80.1 cw(c105.8,80.1) 105.8,79.9 105.618,79.9 ccw(c105.618,79.7) 105.418,79.7 ccw(c105.618,79.7) 105.618,79.5 105.8,79.5 cw(c105.8,79.3) 106,79.3 cw(c105.8,79.3) 105.8,79.1 105.618,79.1 ccw(c105.618,78.9) 105.418,78.9 ccw(c105.618,78.9) 105.618,78.7 105.8,78.7 cw(c105.8,78.5) 106,78.5 cw(c105.8,78.5) 105.8,78.3 105.618,78.3 ccw(c105.618,78.1) 105.418,78.1 ccw(c105.618,78.1) 105.618,77.9 105.8,77.9 cw(c105.8,77.7) 106,77.7 106,77.5 106,77.3 105.762,77.062 105.62,76.92 ccw(c105.762,76.779) 105.62,76.638 105.749,76.509 cw(c105.607,76.368) 105.749,76.226 cw(c105.607,76.368) 105.466,76.226 105.196,76.496 104.926,76.766 ccw(c104.785,76.625) 104.643,76.766 ccw(c104.785,76.625) 104.643,76.483 104.772,76.355 cw(c104.631,76.213) 104.772,76.072 cw(c104.631,76.213) 104.489,76.072 104.361,76.2 ccw(c104.219,76.059) 104.078,76.2 ccw(c104.219,76.059) 104.078,75.918 104.206,75.789 cw(c104.065,75.648) 104.206,75.506 cw(c104.065,75.648) 103.923,75.506 103.795,75.635 ccw(c103.654,75.493) 103.512,75.635 ccw(c103.654,75.493) 103.512,75.352 103.641,75.223 cw(c103.499,75.082) 103.641,74.941 cw(c103.499,75.082) 103.358,74.941 103.229,75.069 ccw(c103.088,74.928) 102.946,75.069 ccw(c103.088,74.928) 102.946,74.786 103.075,74.658 cw(c102.933,74.516) 103.075,74.375 cw(c102.933,74.516) 102.792,74.375 102.664,74.503 ccw(c102.522,74.362) 102.381,74.503 ccw(c102.522,74.362) 102.381,74.22 102.509,74.092 cw(c102.368,73.951) 102.509,73.809 cw(c102.368,73.951) 102.226,73.809 102.098,73.938 ccw(c101.956,73.796) 101.815,73.938 ccw(c101.956,73.796) 101.815,73.655 101.944,73.526 cw(c101.802,73.385) 101.944,73.244 cw(c101.802,73.385) 101.661,73.244 101.532,73.372 ccw(c101.391,73.231) 101.249,73.372 ccw(c101.391,73.231) 101.249,73.089 101.378,72.961 cw(c101.236,72.819) 101.378,72.678 101.236,72.536 101.095,72.395 100.9,72.395 100.3,72.395